# EAGLE board rectifier-power (EAGLE 5.07)

Size 102.85 x 59.36 mm. Coordinates in mm from the lower left corner, seen from the top.
Outline: 0,0 102.85,0 102.85,59.36 0,59.36 0,0
Copper layers (1*16): Top 0.035mm / dielectric 1.5mm / Bottom 0.035mm
Design rules "default": minimum track width 10mil, minimum drill 24mil, track to track 8mil, track to pad 8mil, pad to pad 8mil, via to via 8mil, smd to smd 8mil, copper to edge 40mil, drill to drill 8mil, minimum pad ring 10mil, minimum via ring 8mil, stop-mask expansion 4mil, vias tented up to drill 0mil, thermal gap 10mil

## Footprints (pad centres in the part's own frame; a part is rotated, then mirrored left to right if it is on the bottom)
CPOL-RADIAL-1000UF-63V = drill 1.016 pad 1.651 square: 1 3.81,0 | drill 1.016 pad 1.676 round: 2 -3.81,0
PANASONIC_D = smd 3 x 1.4: + 2.4,0; - -2.4,0
TO252 = smd 1 x 1.6: 1 -2.28,-4.8; 2 2.28,-4.8 | smd 5.4 x 6.2: 3 0,2.5
XH-1X2-LONG-LOCK = drill 1.016 pad 1.88 long: 1 1.397,0; 2 -1.397,0
OSRAM-SIDELED = smd 4 x 4: A 0,2.5; C 0,-2.5
AXIAL-0.3-SMD = smd 2.54 x 2.54: P$1 -5.08,0; P$2 5.08,0
SWITCH-SPDT-AM#6 = drill 0.762 pad 1.27 long: 1 0,2; 2 0,0; 3 0,-2 | drill 1.15 pad 2.184 square: P$1 0,-4.445; P$2 0,4.445
KBP310 = smd 1.93 x 3.81: + -5.7,-10.724; - 5.954,-10.724; AC1 -1.9,-10.724; AC2 1.9,-10.724

## Placement (x,y rotation side)
C1  [CPOL-RADIAL-1000UF-63V]  33.02,15.24 180 top
C2  [CPOL-RADIAL-1000UF-63V]  33.02,31.75 180 top
C4  100u  [PANASONIC_D]  45.72,15.24 90 top
C6  100u  [PANASONIC_D]  54.61,15.24 90 top
IC2  7805DT  [TO252]  48.26,27.94 0 top
JP9  [XH-1X2-LONG-LOCK]  62.23,15.24 270 top
LED1  RED  [OSRAM-SIDELED]  59.69,39.37 270 top
R2  400R  [AXIAL-0.3-SMD]  46.99,39.37 0 top
S1  [SWITCH-SPDT-AM#6]  62.23,26.67 0 top
U$1  KBP310  [KBP310]  15.24,26.67 0 top

## Library data of the parts
C1 C2 C4 C6 JP9 R2 S1 U$1 = digital-toy
IC2 = linear
LED1 = led

## Nets
GND: C1.2 C2.2 C4.- C6.- IC2.3 JP9.1 R2.P$1 U$1.-
N$1: C6.+ IC2.2 S1.1
N$3: JP9.2 S1.3
N$4: LED1.C R2.P$2
N$5: C1.1 C2.1 C4.+ IC2.1 U$1.+
VCC: LED1.A S1.2

## Tracks (layer width: path | path; a pad name or v marks a point on that pad's centre or on a via)
GND  (7 unrouted)
N$1  (2 unrouted)
N$3  (1 unrouted)
N$4  (1 unrouted)
N$5  (4 unrouted)
VCC  (1 unrouted)